# Altium PCB 02_LM2596_PCB.PcbDoc
Units mil, origin at the board's own origin, x right, y up, seen from the top; angles counter-clockwise.
Board outline 2122 x 1064 mil, 2 copper layers (Top Layer, Bottom Layer); 10 components, 6 nets, 29 pads, 0 vias.
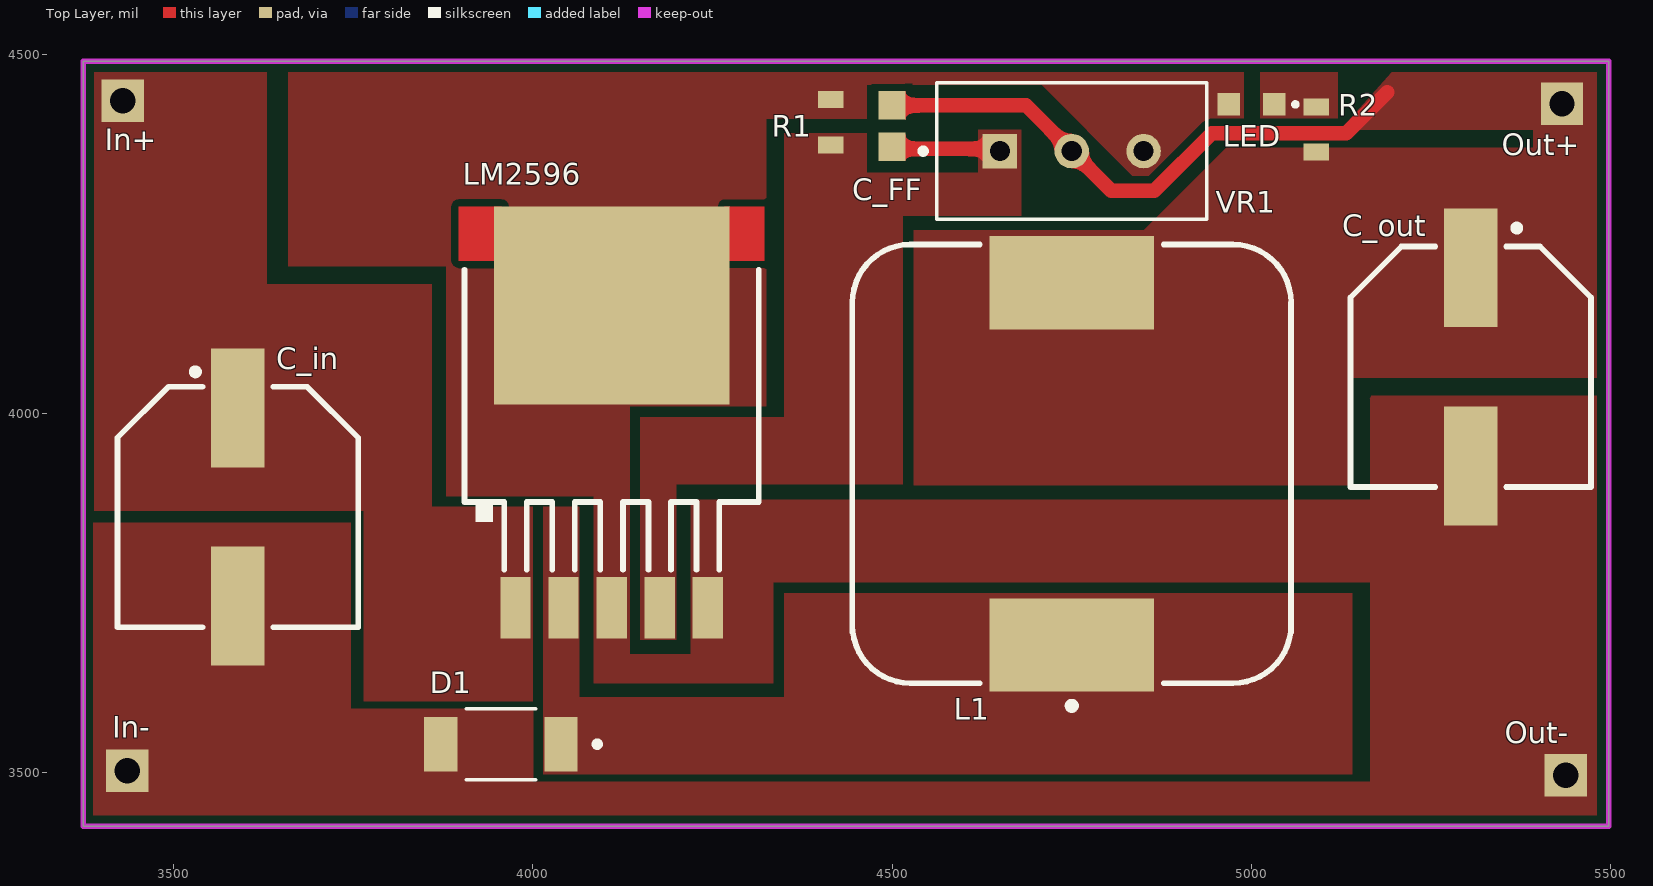
[diagram p0: Top Layer view]
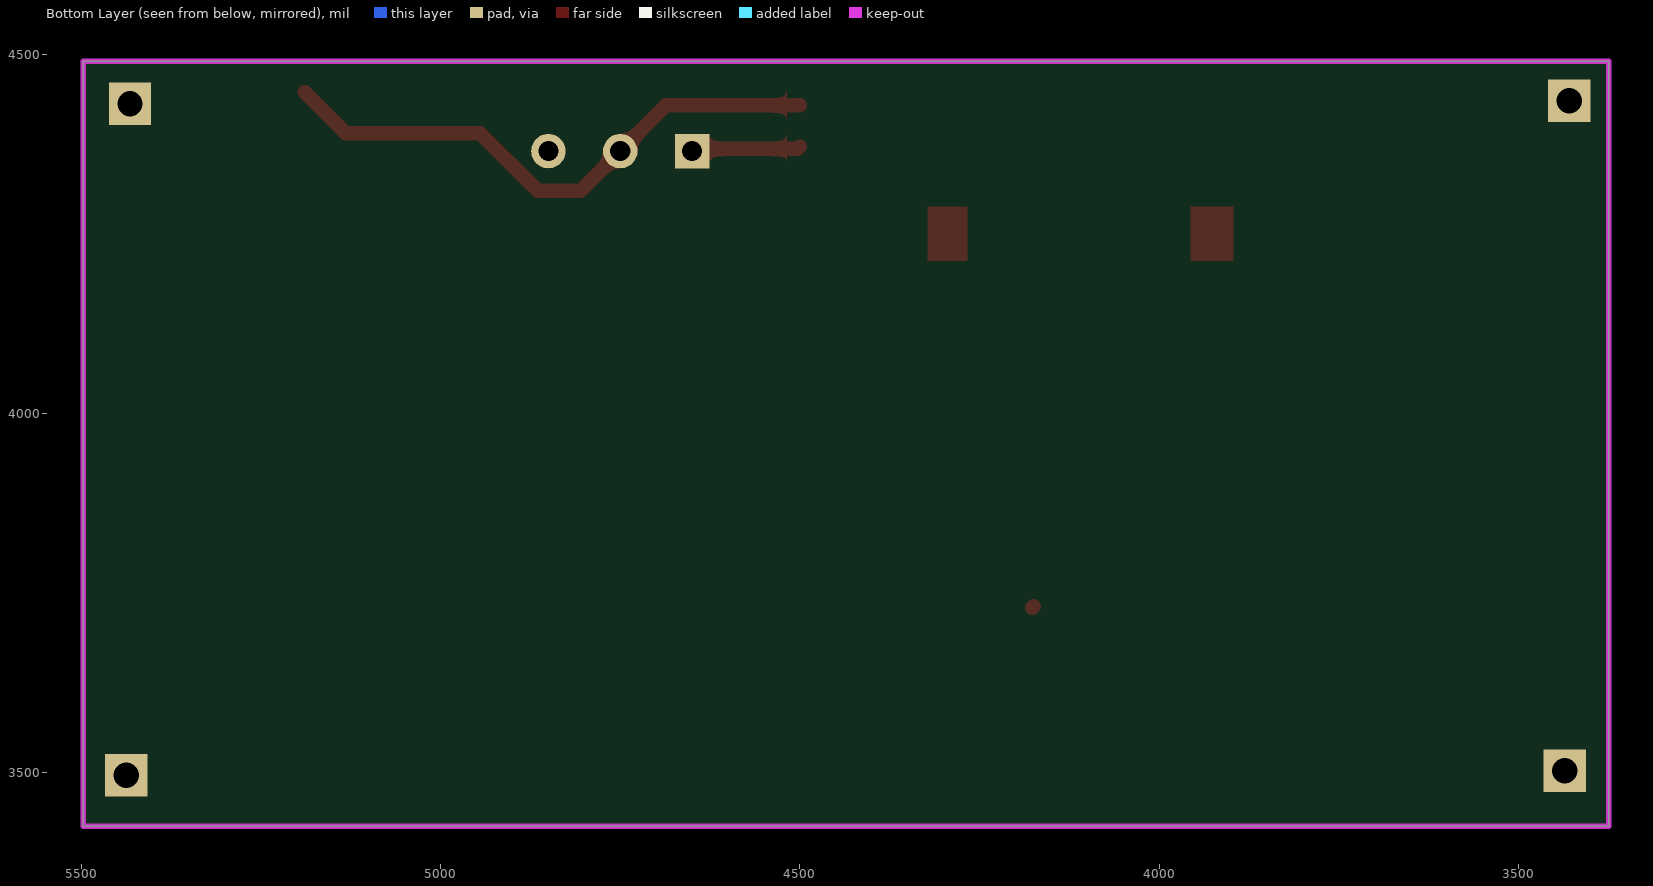
[diagram p1: Bottom Layer view, seen from below]
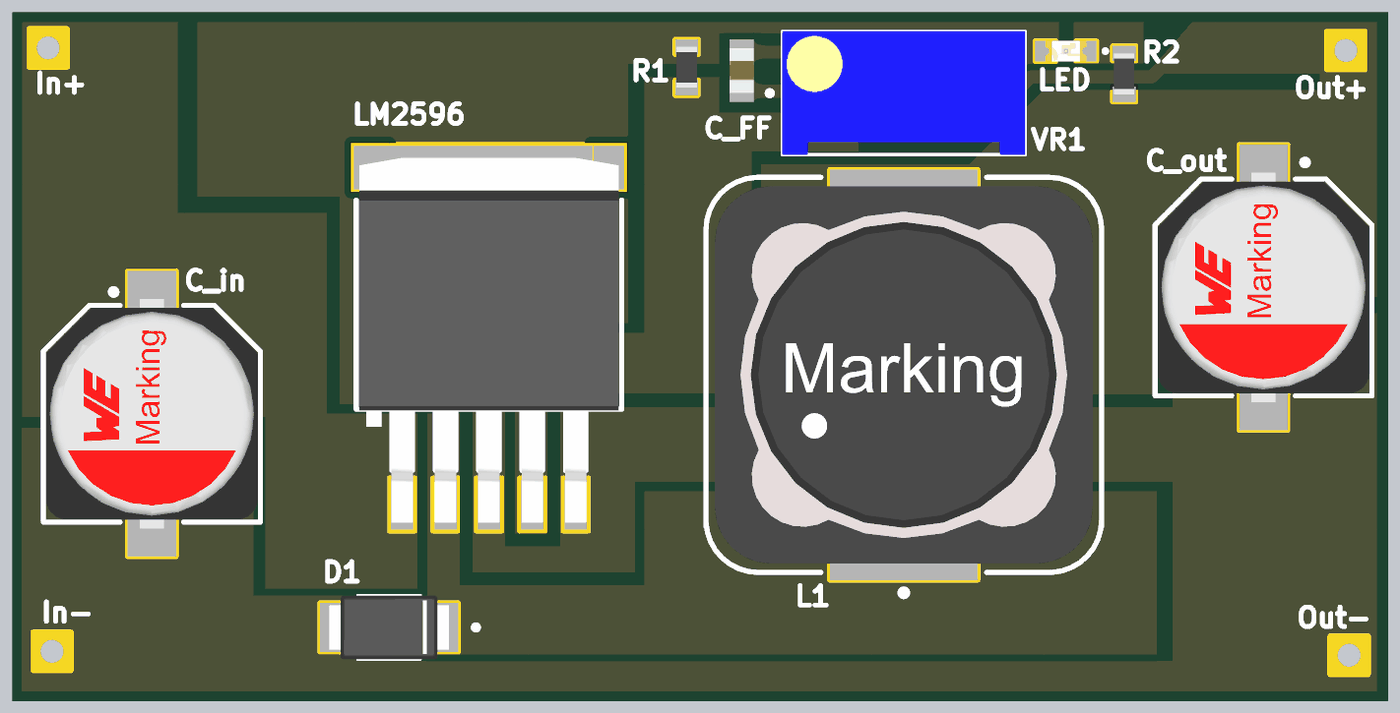
[diagram p2: 3D render of the assembled board from above, using the file's embedded part models]

## Layer stack, top to bottom
Top Solder: solder mask 0.4, Solder Resist, Dk 3.5
Top Layer: signal copper 1.4
Dielectric 1: dielectric 12.6, FR-4, Dk 4.8
Bottom Layer: signal copper 1.4
Bottom Solder: solder mask 0.4, Solder Resist, Dk 3.5

## Board outline
3375,3426 3375,4490 5497,4490 5497,3426

## Design rules (kind name [scope] priority, off if disabled: settings)
Clearance [All] p1: gap=10 ignorepadtopadclearanceinfootprint=FALSE except(0: Arc-Hole Track-Hole SMDPad-Hole THPad-Hole Via-Hole Fill-Hole Poly-Hole Region-Hole Text-Hole)
PolygonConnect PolygonConnect_9 [All vs IsNamedPolygon('NONET_L-01_P-001')] p1: thpad.connectstyle=Direct thpad.reliefconductorwidth=10 thpad.reliefentries=4 thpad.polygonreliefangle="90 Angle" thpad.airgapwidth=10 smdpad.connectstyle=Direct smdpad.reliefconductorwidth=10 smdpad.reliefentries=4 smdpad.polygonreliefangle="90 Angle" smdpad.airgapwidth=10 via.connectstyle=Relief via.reliefconductorwidth=10 via.reliefentries=4 via.polygonreliefangle="90 Angle" via.airgapwidth=10
PolygonConnect PolygonConnect_8 [All vs IsNamedPolygon('NONET_L-01_P-001')] p2: thpad.connectstyle=Direct thpad.reliefconductorwidth=10 thpad.reliefentries=4 thpad.polygonreliefangle="90 Angle" thpad.airgapwidth=10 smdpad.connectstyle=Direct smdpad.reliefconductorwidth=10 smdpad.reliefentries=4 smdpad.polygonreliefangle="90 Angle" smdpad.airgapwidth=10 via.connectstyle=Relief via.reliefconductorwidth=10 via.reliefentries=4 via.polygonreliefangle="90 Angle" via.airgapwidth=10
PolygonConnect PolygonConnect_7 [All vs IsNamedPolygon('NONET_L-01_P-001')] p3: thpad.connectstyle=Direct thpad.reliefconductorwidth=10 thpad.reliefentries=4 thpad.polygonreliefangle="90 Angle" thpad.airgapwidth=10 smdpad.connectstyle=Direct smdpad.reliefconductorwidth=10 smdpad.reliefentries=4 smdpad.polygonreliefangle="90 Angle" smdpad.airgapwidth=10 via.connectstyle=Relief via.reliefconductorwidth=10 via.reliefentries=4 via.polygonreliefangle="90 Angle" via.airgapwidth=10
PolygonConnect PolygonConnect_6 [All vs IsNamedPolygon('NONET_L-01_P-001')] p4: thpad.connectstyle=Direct thpad.reliefconductorwidth=10 thpad.reliefentries=4 thpad.polygonreliefangle="90 Angle" thpad.airgapwidth=10 smdpad.connectstyle=Direct smdpad.reliefconductorwidth=10 smdpad.reliefentries=4 smdpad.polygonreliefangle="90 Angle" smdpad.airgapwidth=10 via.connectstyle=Relief via.reliefconductorwidth=10 via.reliefentries=4 via.polygonreliefangle="90 Angle" via.airgapwidth=10
PolygonConnect PolygonConnect_5 [All vs IsNamedPolygon('NONET_L-01_P-001')] p5: thpad.connectstyle=Direct thpad.reliefconductorwidth=10 thpad.reliefentries=4 thpad.polygonreliefangle="90 Angle" thpad.airgapwidth=10 smdpad.connectstyle=Direct smdpad.reliefconductorwidth=10 smdpad.reliefentries=4 smdpad.polygonreliefangle="90 Angle" smdpad.airgapwidth=10 via.connectstyle=Relief via.reliefconductorwidth=10 via.reliefentries=4 via.polygonreliefangle="90 Angle" via.airgapwidth=10
PolygonConnect PolygonConnect_4 [All vs IsNamedPolygon('NONET_L-01_P-001')] p6: thpad.connectstyle=Direct thpad.reliefconductorwidth=10 thpad.reliefentries=4 thpad.polygonreliefangle="90 Angle" thpad.airgapwidth=10 smdpad.connectstyle=Direct smdpad.reliefconductorwidth=10 smdpad.reliefentries=4 smdpad.polygonreliefangle="90 Angle" smdpad.airgapwidth=10 via.connectstyle=Relief via.reliefconductorwidth=10 via.reliefentries=4 via.polygonreliefangle="90 Angle" via.airgapwidth=10
PolygonConnect PolygonConnect_3 [All vs IsNamedPolygon('NONET_L-01_P-001')] p7: thpad.connectstyle=Direct thpad.reliefconductorwidth=10 thpad.reliefentries=4 thpad.polygonreliefangle="90 Angle" thpad.airgapwidth=10 smdpad.connectstyle=Direct smdpad.reliefconductorwidth=10 smdpad.reliefentries=4 smdpad.polygonreliefangle="90 Angle" smdpad.airgapwidth=10 via.connectstyle=Relief via.reliefconductorwidth=10 via.reliefentries=4 via.polygonreliefangle="90 Angle" via.airgapwidth=10
PolygonConnect PolygonConnect_2 [All vs IsNamedPolygon('NONET_L-01_P-001')] p8: thpad.connectstyle=Direct thpad.reliefconductorwidth=10 thpad.reliefentries=4 thpad.polygonreliefangle="90 Angle" thpad.airgapwidth=10 smdpad.connectstyle=Direct smdpad.reliefconductorwidth=10 smdpad.reliefentries=4 smdpad.polygonreliefangle="90 Angle" smdpad.airgapwidth=10 via.connectstyle=Relief via.reliefconductorwidth=10 via.reliefentries=4 via.polygonreliefangle="90 Angle" via.airgapwidth=10
PolygonConnect PolygonConnect_1 [All vs IsNamedPolygon('NONET_L-01_P-001')] p9: thpad.connectstyle=Direct thpad.reliefconductorwidth=10 thpad.reliefentries=4 thpad.polygonreliefangle="90 Angle" thpad.airgapwidth=10 smdpad.connectstyle=Direct smdpad.reliefconductorwidth=10 smdpad.reliefentries=4 smdpad.polygonreliefangle="90 Angle" smdpad.airgapwidth=10 via.connectstyle=Relief via.reliefconductorwidth=10 via.reliefentries=4 via.polygonreliefangle="90 Angle" via.airgapwidth=10
PolygonConnect [All] p10: connectstyle=Relief reliefconductorwidth=10 reliefentries=4 polygonreliefangle="90 Angle" airgapwidth=10
RoutingVias [All] p1: holewidth=28 width=50 viastyle="Through Hole" minholewidth=28 minwidth=50 maxholewidth=28 maxwidth=50
SolderMaskExpansion [All] p1: expansion=4 istentingtop=FALSE
Width [All] p1: maxlimit=50 minlimit=20 preferedwidth=30 minimp=50.000000 maximp=50.000000 favimp=50.000000
30 further rules are at their usual default settings.

## Classes and differential pairs
component class 01_Schematic: C_FF C_in C_out L1 LED LM2596 R1 VR1

## Components (designator, comment, footprint, x,y, rotation, side; value= is the part's Value field where it differs from the comment)
C_FF "" CAPC17595_87N_KEM_0603 4500,4400 r90 top
C_in "?µF" WCAP-AS5H_D8H10.5 3590,3870 r90 top
C_out "?µF" WCAP-AS5H_D8H10.5 5305,4065 r90 top
D1 "" SODFL4725X110N 3956,3540 r180 top
L1 "?uH, ?A" WE-PD_1510 4750,3930 r0 top (schematic designator L?)
LED "Color ? , 3.2V, 140°" WL-SMCW_0603_150060xx75020 5000,4430 r180 top
LM2596 "LM2596S-12/NOPB" KTT0005B 4110,3940 r270 top (schematic designator U1)
R1 "Ω" WRIS-PSMB_0603_L1.6W0.8H0.3 4415,4405 r270 top
R2 "Ω" WRIS-PSMB_0603_L1.6W0.8H0.3 5090,4395 r270 top (schematic designator 330Ω)
VR1 "" TRIM_3296W 4750,4365 r0 top

## Footprints (in the part's own frame and the unit in brackets; to place one, negate y for a bottom-side part, rotate by r counter-clockwise, add the part's x,y. Pads: shape width x height; smd on the part's side, far side on the other; paste and mask are expansions set on the pad)
CAPC17595_87N_KEM_0603 [mm]
  rect 1.006x0.95 smd paste+0 mask+0: 1(-0.728,0) 2(0.728,0)
  body extent -0.87,-0.48 0.87,0.48, height 0.87
KTT0005B [mm]
  rect 2.16x1.07 smd paste-0.102 mask+0.051: 1(5.338,-3.4) 2(5.338,-1.7) 3(5.338,0.005) 4(5.338,1.7) 5(5.338,3.4)
  rect 6.99x8.33 smd paste-0.102 mask+0.051: 6(-5.338,0)
  Top Layer region: -8.832,5.4 -8.832,4 -6.923,4 -6.923,5.4
  Top Layer region: -8.832,-3.9 -8.832,-5.4 -6.923,-5.4 -6.923,-3.9
  silkscreen extent -6.6,-5.2 4,5.2, body extent -8.26,-5.08 6.05,5.08, height 4.57
SODFL4725X110N [mm]
  rect 1.17x1.92 smd: A(2.125,0) C(-2.125,0)
  silkscreen extent -3.5,-1.25 1.22,1.25, body extent -2.35,-1.25 2.35,1.25, height 1.1
TRIM_3296W [mm]
  rect 1.218x1.218 hole 0.71: 1(-2.54,0)
  round 1.218 hole 0.71: 2(0,0) 3(2.54,0)
  silkscreen extent -5.35,-2.41 4.76,2.42, body extent -4.76,-2.41 4.76,2.42, height 11.55
WCAP-AS5H_D8H10.5 [mm] "Aluminum Electrolytic Capacitors, 8x10.5mm"
  rect 4.2x1.9 smd: 1(3.5,0) 2(-3.5,0)
  silkscreen extent -4.25,-4.25 4.25,4.25, body extent -4.5,-4.15 4.5,4.15, height 10.5
WE-PD_1510 [mm] "SMT Shielded Power Inductor, 2-leads, body 15x15mm"
  rect 5.8x3.3 smd: 1(0,-6.4) 2(0,6.4)
  silkscreen extent -7.75,-8.67 7.75,7.75, body extent -7.4,-7.4 7.4,7.4, height 9.5
WL-SMCW_0603_150060xx75020 [mm] "SMD Mono-color Chip LED, body 1.6x0.8mm"
  rect 0.8x0.8 smd: 1(-0.8,0) 2(0.8,0)
  silkscreen extent -1.63,-0.07 -1.48,0.07, body extent -0.8,-0.4 0.8,0.4, height 0.25
WRIS-PSMB_0603_L1.6W0.8H0.3 [mm] "Metal Plate Resistor, SMT, body size 1.6x0.8mm"
  rect 0.6x0.9 smd: 1(-0.8,0) 2(0.8,0)
  body extent -0.8,-0.4 0.8,0.4, height 0.3

## Part data
C_FF: library part Capacitor_SMD, "No Description Available", Manufacturer_Part_Number=C1206C104K5RACTU, Mfr_Name=Kemet, Copyright="Copyright (C) 2023 Ultra Librarian. All rights reserved.", RefDes=RefDes, Type=DEV
C_in C_out: library part Capacitor_Alumanium_SMD, "WCAP-AS5H Aluminum Electrolytic Capacitor, V-Chip, D10 x H10.5mm, 330µF, 50V", Capacitance=330µF, Capacitance Tolerance=+/-20%, Leakage Current=165µA, Manufacturer="Wurth Elektronik", Manufacturer Part Number=865230657014, Operating Temperature Max=105°C, Operating Temperature Min=-55°C, Rated Voltage (DC)=50V, Ripple Current=900mA, Category="Aluminum Electrolytic Capacitors", ComponentLink1Description="Website Link", ComponentLink1URL=https://www.we-online.com/redexpert/article/865230657014?ad, ComponentLink2Description="Datasheet Link", ComponentLink2URL=https://www.we-online.com/redexpert/spec/865230657014?ad, Diameter=10mm, Dissipation Factor=12%, Endurance=5000h, Height=10.5mm, Match Code=WCAP-AS5H, Mount="Surface Mount", Packaging="Tape and Reel", Technical Reference=ASEF105331M050DVCTEE000
D1: library part "Diode Schottky", "Diode Schottky ?V ?A Surface Mount SMC", Package="DO-214 ON Semiconductor", Arrow_Electronics-Purchase-URL=https://snapeda.com/shop?store=Arrow+Electronics&id=432205, Availability=Good, DigiKey-Purchase-URL=https://snapeda.com/shop?store=DigiKey&id=432205, MF="ON Semiconductor", Mouser-Purchase-URL=https://snapeda.com/shop?store=Mouser&id=432205, MP=MBRS320T3G, Price=None, SnapEDA_Link=https://www.snapeda.com/parts/MBRS320T3G/ON%20Semiconductor/view-part/432205/?ref=snap
L1: library part Inductor_SMD, "WE-PD SMT Power Inductor, size ?, ?uH, ?A, ?Ohm", Case/Size Code=1210, DC Resistance=1800mOhm, DC Resistance Max=2300mOhm, Inductance=1500uH, Manufacturer="Wurth Elektronik", Manufacturer Part Number=7447709152, Operating Temperature Max=125°C, Operating Temperature Min=-40°C, Rated Current=0.8A, Self Resonant Frequency=0.9MHz, Category="Power Inductors", ComponentLink1Description="Website Link", ComponentLink1URL=https://www.we-online.com/redexpert/article/7447709152?ad, ComponentLink2Description="Datasheet Link", ComponentLink2URL=https://www.we-online.com/redexpert/spec/7447709152?ad, Height=10mm, Length=12mm, Match Code=WE-PD, Mount="Surface Mount", Packaging="Tape and Reel", Saturation Current=0.8A, Type=Standard, Width=12mm
LED: library part LED_smd, "WL-SMCW Mono-color Chip LED Waterclear, size ?, color ?, 3.2V, 140°", Case/Size Code=0603, Emitting Color=Blue, Forward Voltage=3.2V, Manufacturer="Wurth Elektronik", Manufacturer Part Number=150060BS75003, Operating Temperature Max=100°C, Operating Temperature Min=-40°C, Category="Signal LEDs", Chip Technology=InGaN, ComponentLink1Description="Website Link", ComponentLink1URL=https://www.we-online.com/redexpert/article/150060BS75003?ad, ComponentLink2Description="Datasheet Link", ComponentLink2URL=https://www.we-online.com/redexpert/spec/150060BS75003?ad, Dominant Wavelength=470nm, Height=0.7mm, Length=1.6mm, Luminous Intensity=350mcd, Match Code=WL-SMCW, Mount="Surface Mount", Packaging="Tape and Reel", Peak Wavelength=465nm, Viewing Angle=140°, Width=0.8mm
LM2596: "No Description Available", Alternate_PartNumber=LM2596S-ADJ/NOPB, Manufacturer="Texas Instruments", PartNumber=LM2596SX-ADJ/NOPB, CompType=IC, Copyright="Copyright (C) 2023 Ultra Librarian. All rights reserved.", Manufacturer_Part_Number=LM2596S-12/NOPB, Mfr_Name="Texas Instruments", MountType=SMT, PackageReference=KTT0005B, RefDes=RefDes, RoHS=Y, Type=DEV
R1: library part Resistor_SMD, "WRIS-PSMC Metal Plate Resistor, SMT, size 2512, 2W, 5mΩ, +/-1%", Case/Size Code=2512, Manufacturer="Wurth Elektronik", Manufacturer Part Number=580070763005, Operating Temperature Max=155°C, Operating Temperature Min=-55°C, Rated Current=20A, Rated Power=2W, Resistance=5mΩ, Resistance Tolerance=+/-1%, Temperature Coefficient of Resistance=+/-100ppm/°C, Category="Metal Plate Resistors", ComponentLink1Description="Website Link", ComponentLink1URL=https://www.we-online.com/redexpert/article/580070763005?ad, ComponentLink2Description="Datasheet Link", ComponentLink2URL=https://www.we-online.com/redexpert/spec/580070763005?ad, Height=0.51mm, Length=6.3mm, Match Code=WRIS-PSMC, Mount="Surface Mount", Packaging="Tape and Reel", Technical Reference=MC2512R005F201KAATE0000, Width=3.1mm
R2: library part Resistor_SMD, "WRIS-PSMC Metal Plate Resistor, SMT, size 2512, 2W, 5mΩ, +/-1%", Case/Size Code=2512, Manufacturer="Wurth Elektronik", Manufacturer Part Number=580070763005, Operating Temperature Max=155°C, Operating Temperature Min=-55°C, Rated Current=20A, Rated Power=2W, Resistance Tolerance=+/-1%, Temperature Coefficient of Resistance=+/-100ppm/°C, Category="Metal Plate Resistors", ComponentLink1Description="Website Link", ComponentLink1URL=https://www.we-online.com/redexpert/article/580070763005?ad, ComponentLink2Description="Datasheet Link", ComponentLink2URL=https://www.we-online.com/redexpert/spec/580070763005?ad, Height=0.51mm, Length=6.3mm, Match Code=WRIS-PSMC, Mount="Surface Mount", Packaging="Tape and Reel", Technical Reference=MC2512R005F201KAATE0000, Width=3.1mm
VR1: library part Variable_Resistor, "? Ohms 0.75W, 3/4W PC Pins Panel Mount, Through Hole Trimmer Potentiometer Cermet 15.0 Turn Side Adjustment", Package="NON-STANDARD-3 Bourns", Availability="In Stock", Check_prices=https://www.snapeda.com/parts/3006P-1-202/Bourns/view-part/?ref=eda, MF=Bourns, MP=3006P-1-202, Price=None, Purchase-URL=https://pricing.snapeda.com/search/part/3006P-1-202/?ref=eda, SnapEDA_Link=https://www.snapeda.com/parts/3006P-1-202/Bourns/view-part/?ref=snap

## Free pads (board coordinates)
  rect 59.06x59.06 hole 35.43: 6(3430,4435) 6(3436,3503) 6(5432,4431) 6(5437,3497)

## Nets (pads, with @x,y where several pads share a name; then routed paths per layer and width w, separated by ;. In a path a pad name is that pad's centre, name@x,y a point inside that pad or via, vN(x,y) a via of type N, cw(c..) or ccw(c..) an arc to the next point about the centre after c; other vN are vias at no path point)
GND: C_in.2 C_out.2 D1.A LED.2 LM2596.3 LM2596.5 LM2596.6 pad.6@3436,3503 pad.6@5437,3497 R1.1 VR1.3
IN+: C_in.1 LM2596.1 pad.6@3430,4435
Net330Ω_1: LED.1 R2.1
Net330Ω_2: C_FF.2 C_out.1 L1.2 pad.6@5432,4431 R2.2 VR1.2 | length 794.9
  Top Layer w20: C_FF.2 4686.35,4428.65 VR1.2 4805,4310 4865,4310 4945,4390 5132,4390 5189,4447
NetC_FF_1: C_FF.1 LM2596.4 R1.2 VR1.1 | length 155.4
  Top Layer w20: LM2596.4@4175,3731.79 LM2596.4 ; C_FF.1 4503.17,4368.17 4646.83,4368.17 VR1.1
NetD1_C: D1.C L1.1 LM2596.2

## Polygon pours and split planes (outlines as drawn)
Net330Ω_1 on Top Layer "NONET_L-01_P-001" (solid, pour order 24): 5012,4411 5120,4411 5120,4475 5012,4475
GND on Top Layer "NONET_L-01_P-001" (solid, pour order 21): 4465,4475 4989,4475 4989,4409 4939,4409 4861,4331 4834,4331 4708,4457 4465,4457
Net330Ω_2 on Top Layer "NONET_L-01_P-001" (solid, remove dead copper, pour order 22): 5195,4475 5124.73,4395 5462,4395 5462,4475
GND on Top Layer "NONET_L-01_P-001" (solid, pour order 20): 5480,3441 3389,3441 3389,3848 3747,3848 3747,3589 4001,3589 4001,3488 5468,3488 5480,3476
Net330Ω_2 on Top Layer "NONET_L-01_P-001" (solid, remove dead copper, pour order 5): 4530,4255 4530,3900 5133.8,3900 5133.8,4050 5480,4050 5480,4475 5392,4475 5392,4370 4965,4370 4850,4255
IN+ on Top Layer "NONET_L-01_P-001" (solid, pour order 15): 3390,3865 3860,3865 3860,4180 3630,4180 3630,4475 3390,4475
GND on Top Layer "NONET_L-01_P-001" (solid, pour order 19): 4465,4410 4465,4475 4255,4475 4255,4410
NetC_FF_1 on Top Layer "NONET_L-01_P-001" (solid, remove dead copper, pour order 13): 4350,4390 4350,3995 4515,3995 4515,4275 4680,4275 4680,4395 4620,4395 4620,4335 4465,4335 4465,4390
GND on Top Layer "NONET_L-01_P-001" (solid, pour order 18): 4325,4010 4325,4475 3660,4475 3660,4205 3880,4205 3880,4010
GND on Top Layer "NONET_L-01_P-001" (solid, pour order 17): 4135,3665 4135,4010 3880,4010 3880,3885 4085,3885 4085,3795 4085,3665
NetD1_C on Top Layer "NONET_L-01_P-001" (solid, remove dead copper, pour order 0): 4015,3870 4015,3498 5140,3498 5140,3750 4350,3750 4350,3605 4065,3605 4065,3870
IN+ on Top Layer "NONET_L-01_P-001" (solid, pour order 16): 4000,3600 3765,3600 3765,3870 4000,3870
GND on Top Layer "NONET_L-01_P-001" (solid, pour order 14): 5480,3455 5480,4025 5160,4025 5165,4020 5165,3880 4230,3880 4225,3875 4220,3880 4220,3665 4085,3665 4085,3625 4335,3625 4335,3765 5165,3765 5165,3455
NetC_FF_1 on Top Layer "NONET_L-01_P-001" (solid, remove dead copper, pour order 11): 4150,3685 4150,3995 4350,3995 4480,4195 4515,4195 4515,3901.67 4200,3901.67 4200,3685

## Keep-outs
Keep-Out Layer:
  the board outline again, w7.87

## Silkscreen, mask and mechanical layers (free items; w line width, h text height)
Top Overlay:
  circle w10: c5369,4258 r4
  circle w10: c3531,4058 r4
  text "In+" at 3405,4366 h30
  text "Out+" at 5348,4359 h30
  text "In-" at 3415,3549 h30
  text "Out-" at 5352,3541 h30